# Altium PCB _BlinkBoard_micro.PcbDoc (part 2 of 2)
Units mil, origin at the board's own origin, x right, y up, seen from the top; angles counter-clockwise.
Board outline 9350 x 6625 mil, 4 copper layers (Top Layer, Int1 (GND), Int2 (PWR), Bottom Layer), stack 53.912 mil thick; 106 components, 151 nets, 563 pads, 3 vias.
Unrouted connection lines stored in the file: 375.
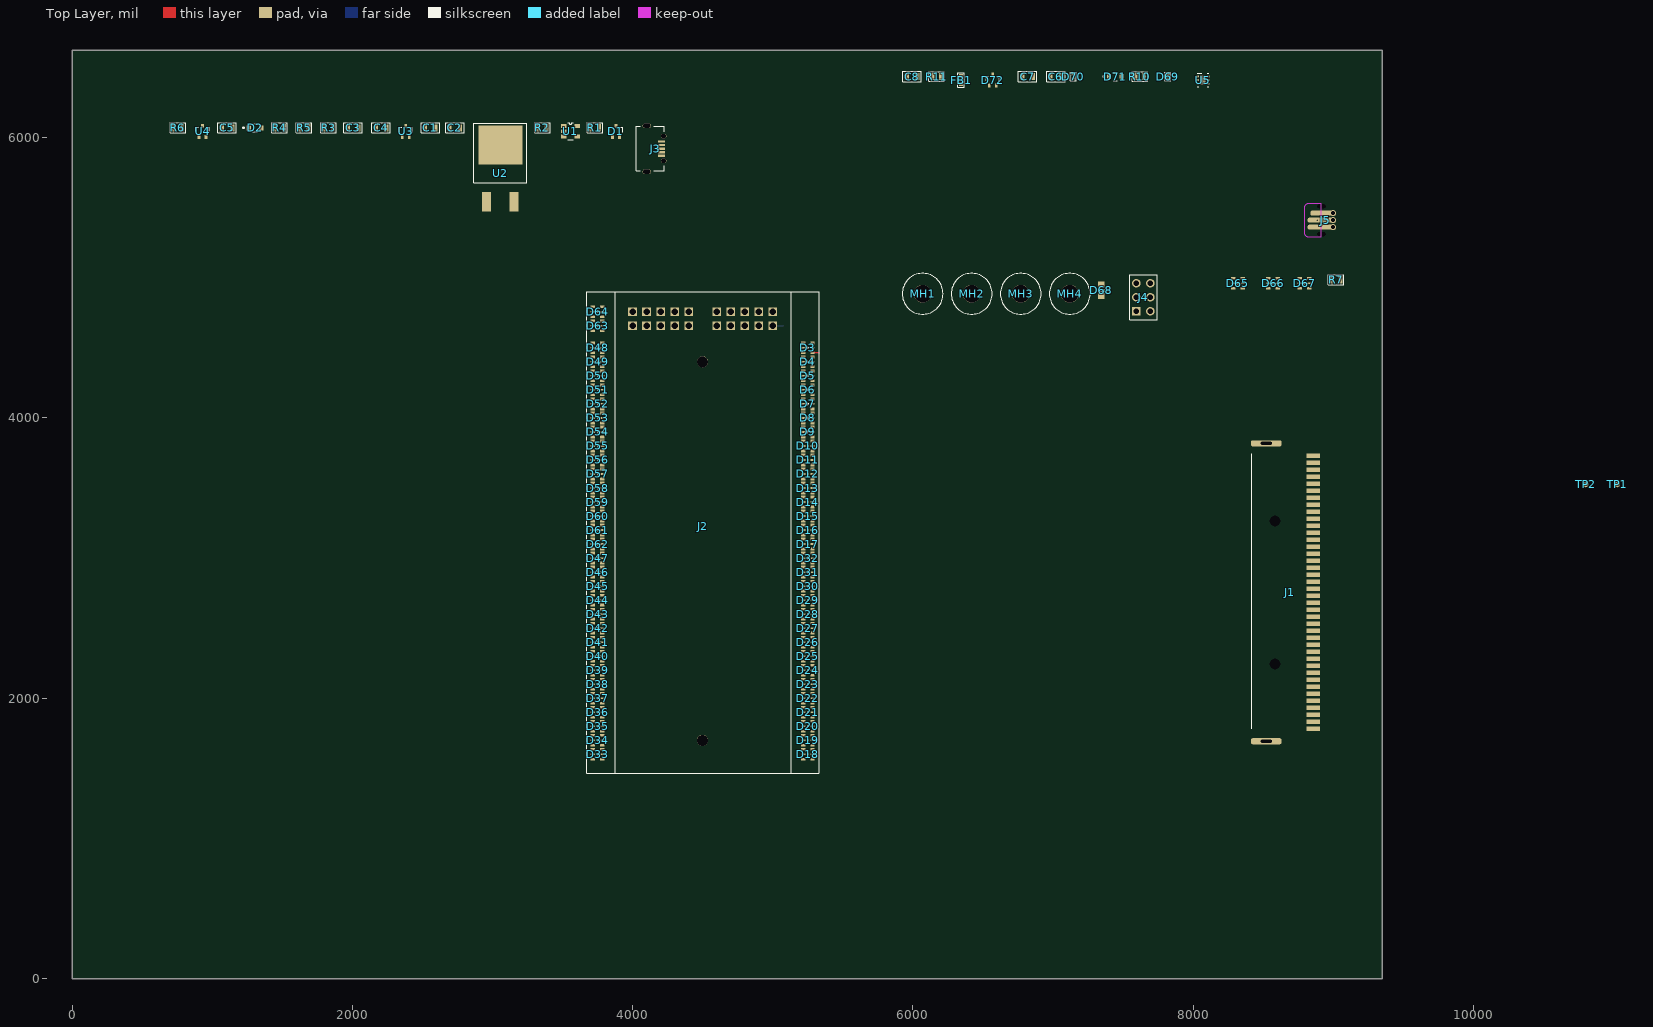
[diagram p0: Top Layer view]

## Part data (continued)
U5: library part TPS2553, "IC PWR DIST SWITCH ADJ 6SON", Case/Package=SON, Manufacturer="Texas Instruments", Max Input Voltage=6.5V, Max Operating Temperature=85°C, Max Output Current=1.5A, Min Input Voltage=2.5V, Min Operating Temperature=-40°C, Package Quantity=3000, Supplier Part Number 1=296-39381-1-ND, Category="Hot Swap Controllers", ComponentLink1Description=https://datasheet.ciiva.com/15108/getdatasheetpartid-625184-15108813.pdf?src-supplier=Verical, ComponentLink1URL=https://datasheet.ciiva.com/15108/getdatasheetpartid-625184-15108813.pdf?src-supplier=Verical, ComponentLink2Description=https://datasheet.ciiva.com/1963/tps2552-1963661.pdf?src-supplier=Digi-Key, ComponentLink2URL=https://datasheet.ciiva.com/1963/tps2552-1963661.pdf?src-supplier=Digi-Key, ComponentLink3Description=https://datasheet.ciiva.com/26072/tps2553-1-26072302.pdf?src-supplier=Avnet+Europe, ComponentLink3URL=https://datasheet.ciiva.com/26072/tps2553-1-26072302.pdf?src-supplier=Avnet+Europe, Fault Protection="Over Temperature", Interface=On/Off, Lead Free="Lead Free", Manufacturer Part Number=TPS2553DRVR-1, Max Supply Voltage=6.5V, Min Supply Voltage=2.5V, Number of Outputs=1, Number of Pins=6, Number of Switches=1, Output Configuration="High Side", Packaging="Tape and Reel", Pricing 1="1=0.91000, 10=0.81300, 25=0.77160, 100=0.63390, 250=0.59256, 500=0.52364, 1000=0.45500 (USD)", Radiation Hardening=No, RoHS=Yes, RoHS Compliant=Yes, Series=-, Supplier 1=Digi-Key, Weight=0.000342oz

## Via types
v1: diameter 19.68, hole 7.87, Top Layer to Bottom Layer, 2 vias
v2: diameter 23.62, hole 11.81, Top Layer to Bottom Layer, tented both sides, 1 vias

## Nets (pads, with @x,y where several pads share a name; then routed paths per layer and width w, separated by ;. In a path a pad name is that pad's centre, name@x,y a point inside that pad or via, vN(x,y) a via of type N, cw(c..) or ccw(c..) an arc to the next point about the centre after c; other vN are vias at no path point)
+3V3: C4.2 D1.3 D2.2 D72.2 J2.1 J2.3 R5.2 R6.2 R7.1 U2.4 U3.1 U4.1 | length 36.3
  Top Layer w10: J2.3@4973,4780 4977.48,4780 J2.3@5000,4757.48
+5: C2.2 C3.2 D1.2 D3.4 D4.4 D5.4 D6.4 D7.4 D8.4 D9.4 D10.4 D11.4 D12.4 D13.4 D14.4 D15.4 D16.4 D17.4 D18.4 D19.4 D20.4 D21.4 D22.4 D23.4 D24.4 D25.4 D26.4 D27.4 D28.4 D29.4 D30.4 D31.4 D32.4 D33.4 D34.4 D35.4 D36.4 D37.4 D38.4 D39.4 D40.4 D41.4 D42.4 D43.4 D44.4 D45.4 D46.4 D47.4 D48.4 D49.4 D50.4 D51.4 D52.4 D53.4 D54.4 D55.4 D56.4 D57.4 D58.4 D59.4 D60.4 D61.4 D62.4 D63.4 D64.4 D65.4 D66.4 D67.4 R1.2 R3.2 R10.2 U1.1 U2.3 U5.1 U5.5 | length 49.7
  Top Layer w10: D3.4 5332.57,4464.57 5333,4465
CKI: J1.26 R6.1 U4.2
CKI5V: D3.2 R3.1 TP2.1 U4.3
GND: C1.1 C2.1 C3.1 C4.1 C6.1 C7.1 C8.1 D3.3 D4.3 D5.3 D6.3 D7.3 D8.3 D9.3 D10.3 D11.3 D12.3 D13.3 D14.3 D15.3 D16.3 D17.3 D18.3 D19.3 D20.3 D21.3 D22.3 D23.3 D24.3 D25.3 D26.3 D27.3 D28.3 D29.3 D30.3 D31.3 D32.3 D33.3 D34.3 D35.3 D36.3 D37.3 D38.3 D39.3 D40.3 D41.3 D42.3 D43.3 D44.3 D45.3 D46.3 D47.3 D48.3 D49.3 D50.3 D51.3 D52.3 D53.3 D54.3 D55.3 D56.3 D57.3 D58.3 D59.3 D60.3 D61.3 D62.3 D63.3 D64.3 D65.3 D66.3 D67.3 D68.1 D69.1 D70.1 D72.1 J1.38 J1.39 J1.40 J2.2 J2.4 J5.2 U1.2 U1.4 U2.1 U5.2 | length 73.6
  Bottom Layer w10: J2.4@5000,4657.48 5071.48,4657.48 5073,4659
  other v2: 8884.16,5411
JD_DATA: D70.2 FB1.2 J5.1
JD_PWR: D69.2 D71.1 J5.3
NetC6_2: C6.2 D71.2 U5.6
NetC7_2: C7.2 R10.1 U5.3 U5.4
NetC8_2: C8.2 FB1.1 R11.2
NetD2_1: D2.1 J1.27 J1.28 J1.29 J1.30 J1.31 J1.32
NetD3_5: D3.5 D4.2
NetD3_6: D3.6 D4.1
NetD4_5: D4.5 D5.2
NetD4_6: D4.6 D5.1
NetD5_5: D5.5 D6.2
NetD5_6: D5.6 D6.1
NetD6_5: D6.5 D7.2
NetD6_6: D6.6 D7.1
NetD7_5: D7.5 D8.2
NetD7_6: D7.6 D8.1
NetD8_5: D8.5 D9.2
NetD8_6: D8.6 D9.1
NetD9_5: D9.5 D10.2
NetD9_6: D9.6 D10.1
NetD10_5: D10.5 D11.2
NetD10_6: D10.6 D11.1
NetD11_5: D11.5 D12.2
NetD11_6: D11.6 D12.1
NetD12_5: D12.5 D13.2
NetD12_6: D12.6 D13.1
NetD13_5: D13.5 D14.2
NetD13_6: D13.6 D14.1
NetD14_5: D14.5 D15.2
NetD14_6: D14.6 D15.1
NetD15_5: D15.5 D16.2
NetD15_6: D15.6 D16.1
NetD16_5: D16.5 D17.2
NetD16_6: D16.6 D17.1
NetD17_5: D17.5 D32.2
NetD17_6: D17.6 D32.1
NetD18_1: D18.1 D19.6
NetD18_2: D18.2 D19.5
NetD18_5: D18.5 D33.2
NetD18_6: D18.6 D33.1
NetD19_1: D19.1 D20.6
NetD19_2: D19.2 D20.5
NetD20_1: D20.1 D21.6
NetD20_2: D20.2 D21.5
NetD21_1: D21.1 D22.6
NetD21_2: D21.2 D22.5
NetD22_1: D22.1 D23.6
NetD22_2: D22.2 D23.5
NetD23_1: D23.1 D24.6
NetD23_2: D23.2 D24.5
NetD24_1: D24.1 D25.6
NetD24_2: D24.2 D25.5
NetD25_1: D25.1 D26.6
NetD25_2: D25.2 D26.5
NetD26_1: D26.1 D27.6
NetD26_2: D26.2 D27.5
NetD27_1: D27.1 D28.6
NetD27_2: D27.2 D28.5
NetD28_1: D28.1 D29.6
NetD28_2: D28.2 D29.5
NetD29_1: D29.1 D30.6
NetD29_2: D29.2 D30.5
NetD30_1: D30.1 D31.6
NetD30_2: D30.2 D31.5
NetD31_1: D31.1 D32.6
NetD31_2: D31.2 D32.5
NetD33_5: D33.5 D34.2
NetD33_6: D33.6 D34.1
NetD34_5: D34.5 D35.2
NetD34_6: D34.6 D35.1
NetD35_5: D35.5 D36.2
NetD35_6: D35.6 D36.1
NetD36_5: D36.5 D37.2
NetD36_6: D36.6 D37.1
NetD37_5: D37.5 D38.2
NetD37_6: D37.6 D38.1
NetD38_5: D38.5 D39.2
NetD38_6: D38.6 D39.1
NetD39_5: D39.5 D40.2
NetD39_6: D39.6 D40.1
NetD40_5: D40.5 D41.2
NetD40_6: D40.6 D41.1
NetD41_5: D41.5 D42.2
NetD41_6: D41.6 D42.1
NetD42_5: D42.5 D43.2
NetD42_6: D42.6 D43.1
NetD43_5: D43.5 D44.2
NetD43_6: D43.6 D44.1
NetD44_5: D44.5 D45.2
NetD44_6: D44.6 D45.1
NetD45_5: D45.5 D46.2
NetD45_6: D45.6 D46.1
NetD46_5: D46.5 D47.2
NetD46_6: D46.6 D47.1
NetD47_5: D47.5 D62.2
NetD47_6: D47.6 D62.1
NetD48_1: D48.1 D49.6
NetD48_2: D48.2 D49.5
NetD48_5: D48.5 D63.2
NetD48_6: D48.6 D63.1
NetD49_1: D49.1 D50.6
NetD49_2: D49.2 D50.5
NetD50_1: D50.1 D51.6
NetD50_2: D50.2 D51.5
NetD51_1: D51.1 D52.6
NetD51_2: D51.2 D52.5
NetD52_1: D52.1 D53.6
NetD52_2: D52.2 D53.5
NetD53_1: D53.1 D54.6
NetD53_2: D53.2 D54.5
NetD54_1: D54.1 D55.6
NetD54_2: D54.2 D55.5
NetD55_1: D55.1 D56.6
NetD55_2: D55.2 D56.5
NetD56_1: D56.1 D57.6
NetD56_2: D56.2 D57.5
NetD57_1: D57.1 D58.6
NetD57_2: D57.2 D58.5
NetD58_1: D58.1 D59.6
NetD58_2: D58.2 D59.5
NetD59_1: D59.1 D60.6
NetD59_2: D59.2 D60.5
NetD60_1: D60.1 D61.6
NetD60_2: D60.2 D61.5
NetD61_1: D61.1 D62.6
NetD61_2: D61.2 D62.5
NetD63_5: D63.5 D64.2
NetD63_6: D63.6 D64.1
NetD64_5: D64.5 D65.2
NetD64_6: D64.6 D65.1
NetD65_5: D65.5 D66.2
NetD65_6: D65.6 D66.1
NetD66_5: D66.5 D67.2
NetD66_6: D66.6 D67.1
NetD68_2: D68.2 R7.2
NetD72_3: D72.3 J1.18 R11.1
NetJ3_2: J3.2 R2.1
NetJ3_3: J3.3 R2.2
P0: J1.2 J1.3 J1.4 J1.5 J4.1 J4.2
P1: J1.10 J1.11 J1.12 J1.13 J4.3 J4.4
P2: J1.19 J1.20 J1.21 J1.22 J4.5 J4.6
SDI: J1.14 R5.1 U3.2
SDI5V: D3.1 R1.1 TP1.1 U3.3
SHIELD: C5.1 J3.6 J3.7 R4.1
UBIT_GND: C5.2 J1.35 J1.36 J1.37 J3.5 R4.2
VBUS: C1.2 J3.1 U1.5
pads on no net: D1.1 D67.5 D67.6 J1. J1.1 J1.6 J1.7 J1.8 J1.9 J1.15 J1.16 J1.17 J1.23 J1.24 J1.25 J1.33 J1.34 J2. J3.4 J5. MH1. MH2. MH3. MH4. U1.3 U5.7
copper on no net:
  other v1: 8069,6389.35 8069,6432.65

## Text inside footprints (layer, text, board x,y; h text height)
J5: Mechanical 9 "Jacdac / cable connector  / body" at 8625,5221.19 h66.93 r90; Mechanical 8 "board outline  / for 'innie'" at 9097,5589.35 h47.24 r90; Mechanical 8 "board outline  / for 'outie'" at 8985,5613.35 h47.24 r90; Top Courtyard "optionally bevel/chamfer  / edge of PCB here" at 8743.41,5529.11 h66.93 r90